# EAGLE board Iso_Spacer (EAGLE 9.5.2)
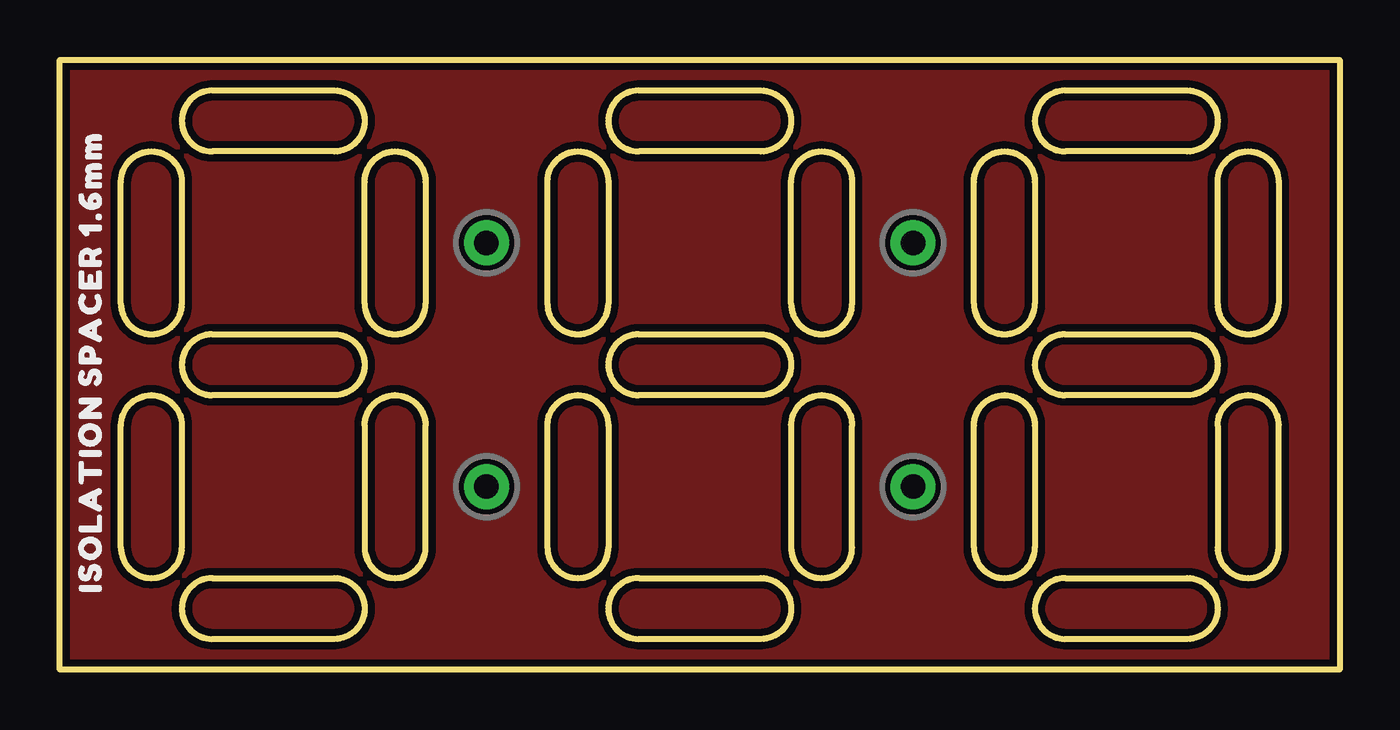
[diagram p0: board, top side]
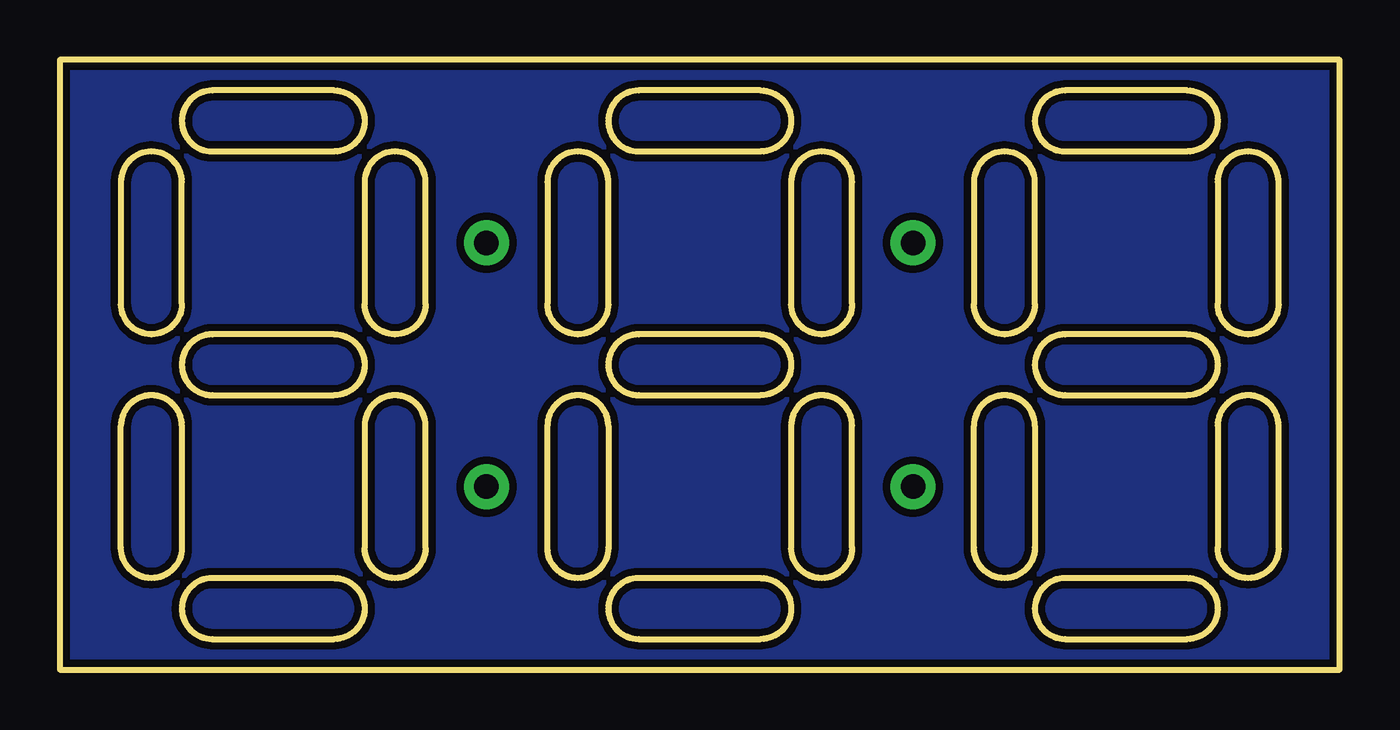
[diagram p1: board, bottom side, seen from below]

Size 53.34 x 25.4 mm. Coordinates in mm from the lower left corner, seen from the top.
Outline: 0,25.4 53.34,25.4 53.34,0 0,0 0,25.4
Outline: 6.35,24.13 11.43,24.13 arc-180 11.43,21.59 6.35,21.59 arc-180 6.35,24.13
Outline: 5.08,20.32 5.08,15.24 arc-180 2.54,15.24 2.54,20.32 arc-180 5.08,20.32
Outline: 15.24,20.32 15.24,15.24 arc-180 12.7,15.24 12.7,20.32 arc-180 15.24,20.32
Outline: 6.35,13.97 11.43,13.97 arc-180 11.43,11.43 6.35,11.43 arc-180 6.35,13.97
Outline: 5.08,10.16 5.08,5.08 arc-180 2.54,5.08 2.54,10.16 arc-180 5.08,10.16
Outline: 12.7,10.16 12.7,5.08 arc180 15.24,5.08 15.24,10.16 arc180 12.7,10.16
Outline: 6.35,3.81 11.43,3.81 arc-180 11.43,1.27 6.35,1.27 arc-180 6.35,3.81
Outline: 24.13,24.13 29.21,24.13 arc-180 29.21,21.59 24.13,21.59 arc-180 24.13,24.13
Outline: 22.86,20.32 22.86,15.24 arc-180 20.32,15.24 20.32,20.32 arc-180 22.86,20.32
Outline: 33.02,20.32 33.02,15.24 arc-180 30.48,15.24 30.48,20.32 arc-180 33.02,20.32
Outline: 24.13,13.97 29.21,13.97 arc-180 29.21,11.43 24.13,11.43 arc-180 24.13,13.97
Outline: 22.86,10.16 22.86,5.08 arc-180 20.32,5.08 20.32,10.16 arc-180 22.86,10.16
Outline: 30.48,10.16 30.48,5.08 arc180 33.02,5.08 33.02,10.16 arc180 30.48,10.16
Outline: 24.13,3.81 29.21,3.81 arc-180 29.21,1.27 24.13,1.27 arc-180 24.13,3.81
Outline: 41.91,24.13 46.99,24.13 arc-180 46.99,21.59 41.91,21.59 arc-180 41.91,24.13
Outline: 40.64,20.32 40.64,15.24 arc-180 38.1,15.24 38.1,20.32 arc-180 40.64,20.32
Outline: 50.8,20.32 50.8,15.24 arc-180 48.26,15.24 48.26,20.32 arc-180 50.8,20.32
Outline: 41.91,13.97 46.99,13.97 arc-180 46.99,11.43 41.91,11.43 arc-180 41.91,13.97
Outline: 40.64,10.16 40.64,5.08 arc-180 38.1,5.08 38.1,10.16 arc-180 40.64,10.16
Outline: 48.26,10.16 48.26,5.08 arc180 50.8,5.08 50.8,10.16 arc180 48.26,10.16
Outline: 41.91,3.81 46.99,3.81 arc-180 46.99,1.27 41.91,1.27 arc-180 41.91,3.81
Copper layers (1*16): Top 0.035mm / dielectric 1.5mm / Bottom 0.035mm
Design rules "SparkFun-2-Layer-Minimum-JLCPCB": minimum track width 5mil, minimum drill 0.3mm, track to track 5mil, track to pad 5mil, pad to pad 5mil, via to via 5mil, smd to smd 5mil, copper to edge 7mil, drill to drill 7mil, minimum pad ring 5mil, minimum via ring 5mil, stop-mask expansion 4mil, vias tented up to drill 25mil, thermal gap 10mil

## Placement (x,y rotation side)
E$4  [ISOLATION_SPACER_1#6MM0]  1.27,2.54 90 top

## Library data of the parts
E$4 = output

## Tracks (layer width: path | path; a pad name or v marks a point on that pad's centre or on a via)
GND
  pour Top (isolate 0.305): 0,25.4 53.34,25.4 53.34,0 0,0
  pour Bottom (isolate 0.305): 0,25.4 53.34,25.4 53.34,0 0,0
N$52  (via drill 1.02 pad 1.88)
  other vias: 35.56,7.62
N$53  (via drill 1.02 pad 1.88)
  other vias: 35.56,17.78
N$54  (via drill 1.02 pad 1.88)
  other vias: 17.78,17.78
N$55  (via drill 1.02 pad 1.88)
  other vias: 17.78,7.62